# Altium PCB PCB1.PcbDoc
Units mil, origin at the board's own origin, x right, y up, seen from the top; angles counter-clockwise.
Board outline 6000 x 4000 mil, 2 copper layers (Top Layer, Bottom Layer); 4 components, 14 nets, 51 pads, 0 vias.
Unrouted connection lines stored in the file: 8.
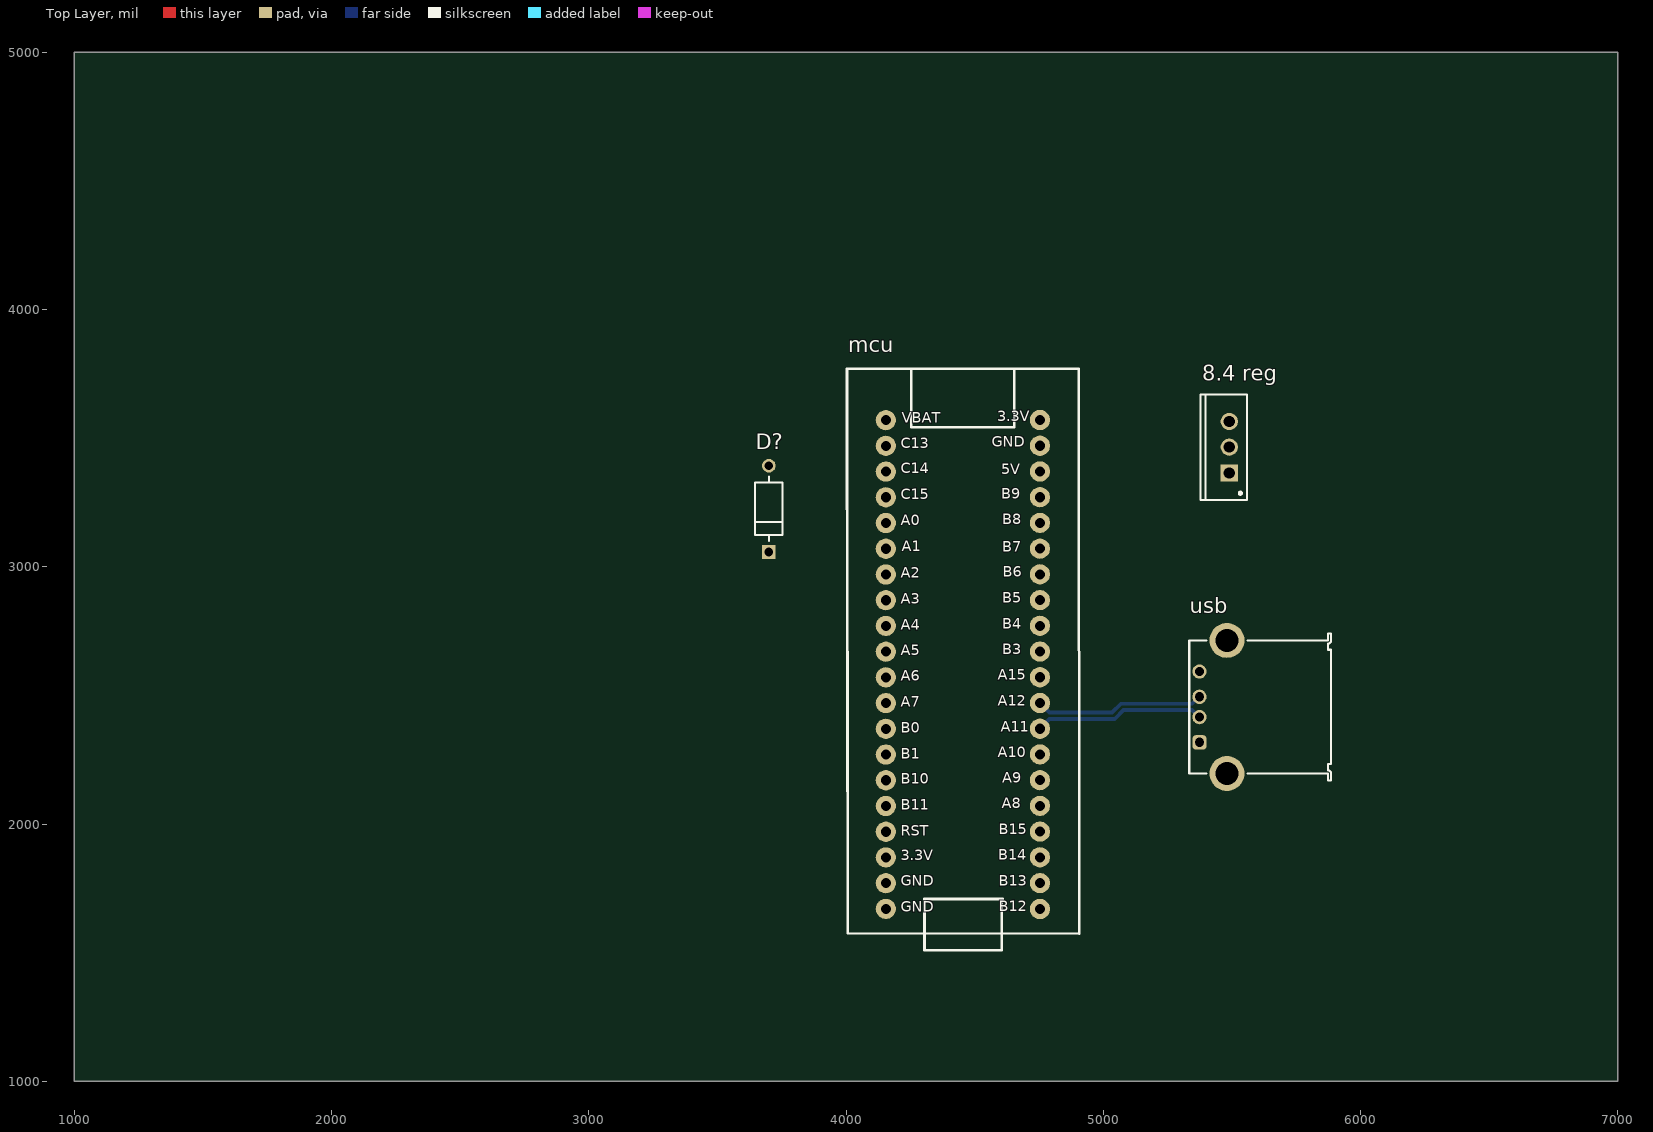
[diagram p0: Top Layer view]
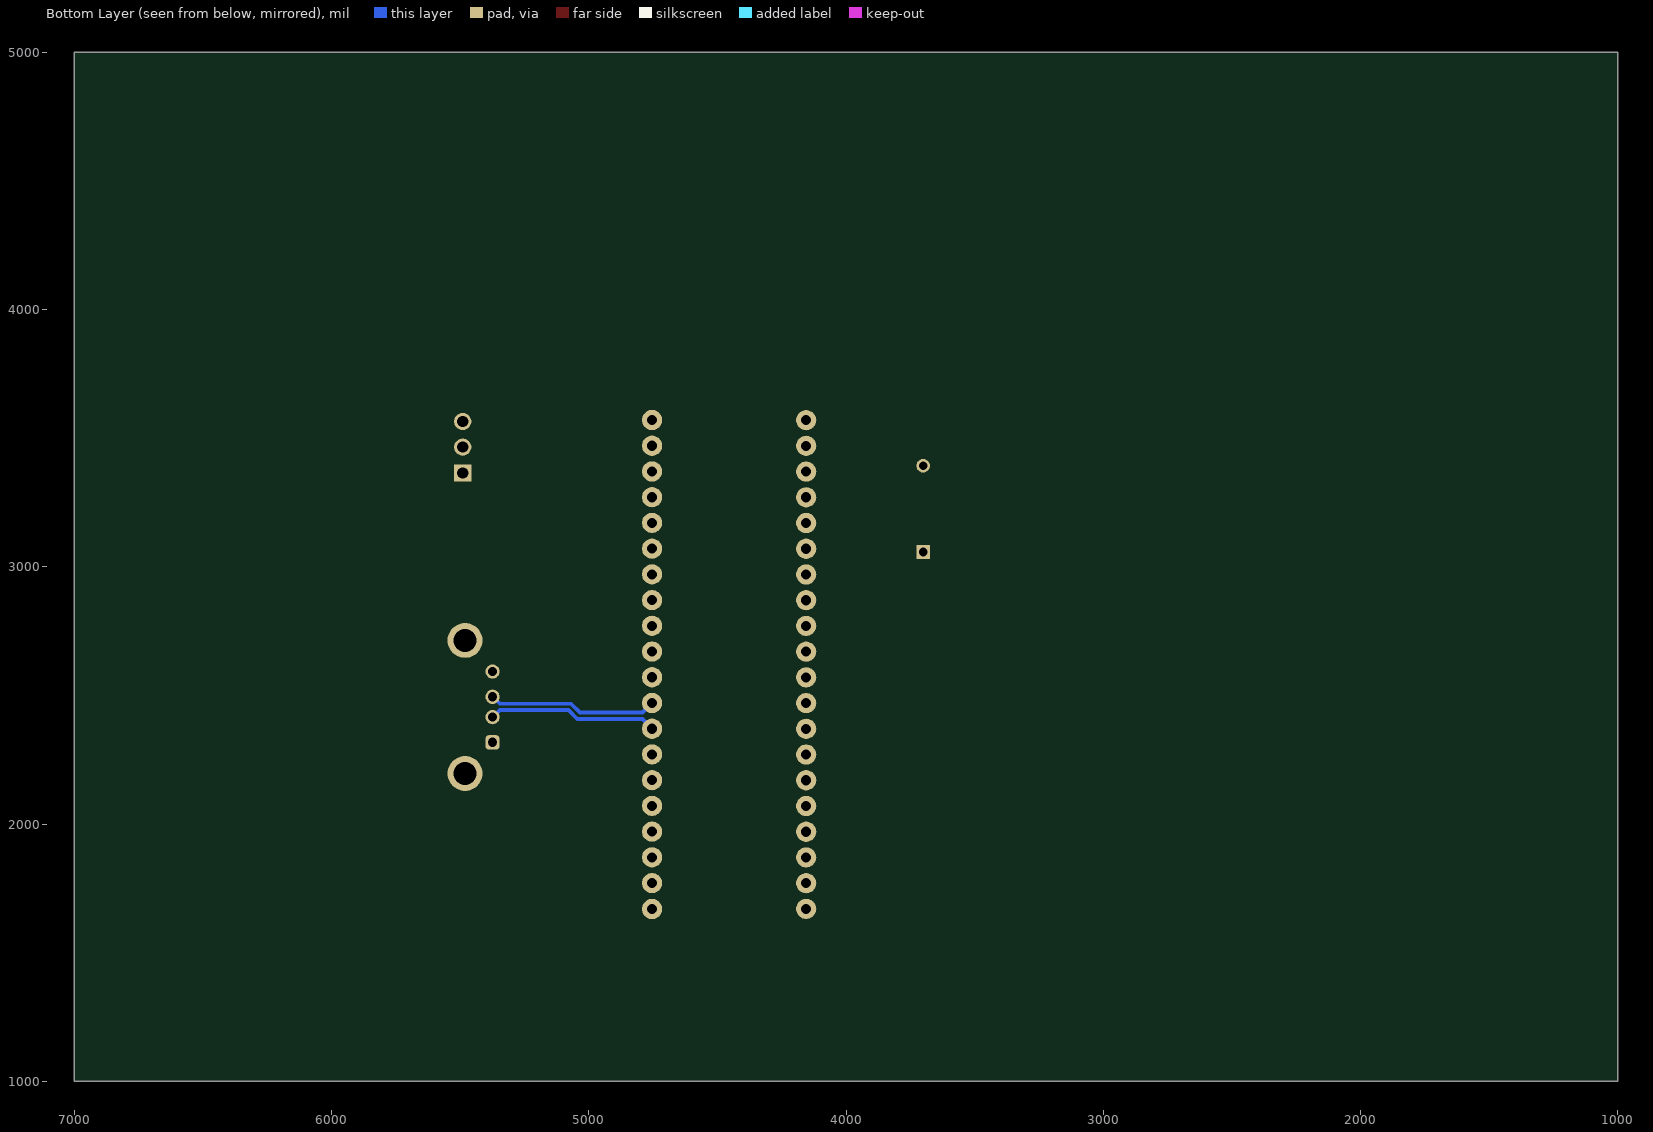
[diagram p1: Bottom Layer view, seen from below]

## Layer stack, top to bottom
Top Solder: solder mask 0.4, Solder Resist, Dk 3.5
Top Layer: signal copper 1.4
Dielectric 1: dielectric 12.6, FR-4, Dk 4.8
Bottom Layer: signal copper 1.4
Bottom Solder: solder mask 0.4, Solder Resist, Dk 3.5

## Board outline
1000,1000 7000,1000 7000,5000 1000,5000

## Design rules (kind name [scope] priority, off if disabled: settings)
Clearance [All] p1: gap=10 ignorepadtopadclearanceinfootprint=FALSE
DiffPairsRouting [All] p1: maxlimit=10 minlimit=10 mostfreqgap=10 toplayer_minwidth=15 toplayer_maxwidth=15 toplayer_prefwidth=15 bottomlayer_minwidth=15 bottomlayer_maxwidth=15 bottomlayer_prefwidth=15 maxuncoupledlength=500
PolygonConnect [All] p1: connectstyle=Relief reliefconductorwidth=10 reliefentries=4 polygonreliefangle="90 Angle" airgapwidth=10
RoutingVias [All] p1: holewidth=28 width=50 viastyle="Through Hole" minholewidth=28 minwidth=50 maxholewidth=28 maxwidth=50
SolderMaskExpansion [All] p1: expansion=4 istentingtop=FALSE
SupplyNets "Schematic Supply Nets_2" [InNet('GND')] p1: voltage=0.000
SupplyNets "Schematic Supply Nets_1" [InNet('+12')] p2: voltage=0.000
SupplyNets "Schematic Supply Nets" [InNet('+5')] p3: voltage=0.000
Width [All] p1: maxlimit=10 minlimit=10 preferedwidth=10
29 further rules are at their usual default settings.

## Classes and differential pairs
differential pair USB: +USB_P -USB_N

## Components (designator, comment, footprint, x,y, rotation, side; value= is the part's Value field where it differs from the comment)
"8.4 reg" "L4940V85" TO220 5490,3465 r90 top
D? "1N4007E-E3/54" FP-1N4007E-E3-54-MFG 3700,3225 r90 top
mcu "STM32F103C8T6" "Stm32 BluePill" 4445.8,2846.93 r0 top
usb "61400416021" 61400416021 5610,2455 r90 top

## Footprints (in the part's own frame and the unit in brackets; to place one, negate y for a bottom-side part, rotate by r counter-clockwise, add the part's x,y. Pads: shape width x height; smd on the part's side, far side on the other; paste and mask are expansions set on the pad)
61400416021 [mm] "USB 2.0 Type A Horizontal"
  rrect50% 1.42x1.42 hole 0.92: 1(-3.5,5.99)
  round 1.42 hole 0.92: 2(-1,5.99) 3(1,5.99) 4(3.5,5.99)
  round 3.45 hole 2.3: Shell(-6.57,3.28) Shell(6.57,3.28)
  silkscreen extent -7.25,-7 7.25,7, body extent -8,-7 8,7, height 7.63
FP-1N4007E-E3-54-MFG [mm]
  rect 1.35x1.35 hole 0.85 paste-2539.97 mask+0: 1(-4.26,0)
  round 1.35 hole 0.85 paste-2539.97 mask+0: 2(4.26,0)
  silkscreen extent -3.18,-1.35 3.18,1.35, body extent -5.03,-1.45 5.03,1.45, height 0.25
"Stm32 BluePill" [mm]
  round 2 hole 1: 1(7.828,-29.909) 2(7.828,-27.343) 3(7.828,-24.803) 4(7.828,-22.263) 5(7.828,-19.723) 6(7.828,-17.183) 7(7.828,-14.643) 8(7.828,-12.103) 9(7.828,-9.563) 10(7.828,-7.023) 11(7.828,-4.483) 12(7.828,-1.943) 13(7.828,0.597) 14(7.828,3.137) 15(7.828,5.677) 16(7.828,8.217) 17(7.828,10.757) 18(7.828,13.297) 19(7.828,15.837) 20(7.828,18.377) 21(-7.386,18.366) 22(-7.386,15.826) 23(-7.386,13.286) 24(-7.386,10.746) 25(-7.386,8.206) 26(-7.386,5.666) 27(-7.386,3.126) 28(-7.386,0.586) 29(-7.386,-1.954) 30(-7.386,-4.494) 31(-7.386,-7.034) 32(-7.386,-9.574) 33(-7.386,-12.114) 34(-7.386,-14.654) 35(-7.386,-17.194) 36(-7.386,-19.734) 37(-7.386,-22.274) 38(-7.386,-24.814) 39(-7.386,-27.354) 40(-7.386,-29.894)
  silkscreen extent -11.22,-34 11.69,23.43, body extent -11.18,-33.27 11.68,24.29, height 12.31
TO220 [mm] "TO, Thru-Hole, Vertical, Heatsink Mounted; 3 In-Line Leads; Pitch 2.54 mm"
  rect 1.7x1.7 hole 1.1: 1(-2.54,0)
  round 1.7 hole 1.1: 2(0,0) 3(2.54,0)
  silkscreen extent -5.2,-1.75 5.2,2.85, body extent -5.25,-1.8 5.25,2.9, height 19.7

## Part data
"8.4 reg": library part CMP-0244-00412-1, "1.5A Very Low Drop Regulator, 3-Pin TO-220", ComponentLink1Description="Manufacturer URL", ComponentLink1URL=http://www.st.com, ComponentLink2Description=Datasheet, ComponentLink2URL=http://www.st.com/internet/com/TECHNICAL_RESOURCES/TECHNICAL_LITERATURE/DATASHEET/CD00000442.pdf, ComponentLink3Description="Package Specification", ComponentLink3URL=http://www.st.com/internet/com/TECHNICAL_RESOURCES/TECHNICAL_LITERATURE/PACKAGE_INFORMATION/CD00004649.pdf, DatasheetVersion=16/12/2009, PackageDescription="TO, Thru-Hole, Vertical, Heatsink Mounted; 3 In-Line Leads; Pitch 2.54 mm", PackageReference=TO220, PackageVersion=ver3.0
D?: library part CMP-02540-000087-1, "DIODE GEN PURP 1KV 1A DO204AL", Average Rectified Current=1A, Case/Package=DO-41, Forward Voltage=1.1V, Max Operating Temperature=150°C, Max Repetitive Reverse Voltage (Vrrm)=1kV, Max Reverse Current=5uA, Max Surge Current=45A, Min Operating Temperature=-50°C, Package Quantity=5500, Contact Plating=Tin, Element Configuration=Single, Max Reverse Voltage (DC)=1kV, Mount="Through Hole", Number of Pins=2, Packaging="Tape and Reel", Peak Non-Repetitive Surge Current=45A, Radiation Hardening=No, Reverse Voltage=1kV, RoHS Compliant=Yes, Series=-
mcu: library part BluePill, "Designed By @Alixahedi"
usb: library part CMP-1502-03227-2, Color=White, Contact Resistance=20mΩ, Current Rating=1.5A, Flammability Rating="UL94 V-0", Insulation Resistance=1GΩ, Max Operating Temperature=105°C, Min Operating Temperature=-40°C, Operating Supply Voltage=30V, Connector Type=USB, Contact Material=Copper, Contact Plating=Gold, Gender=Receptacle, Insulation Material=PBT, Lead Free="Lead Free", Length=15.8mm, Mount="Horizontal, Through Hole", NexarPartId=21041530, Number of Contacts=4, Number of Pins=4, Number of Ports=1, Number of Positions=4, Orientation=Horizontal, REACH SVHC=Unknown, RoHS=Compliant, Termination=Solder, USB Standard="USB 2.0", Voltage Rating=30V, Voltage Rating (DC)=30V, Width=14.4mm

## Nets (pads, with @x,y where several pads share a name; then routed paths per layer and width w, separated by ;. In a path a pad name is that pad's centre, name@x,y a point inside that pad or via, vN(x,y) a via of type N, cw(c..) or ccw(c..) an arc to the next point about the centre after c; other vN are vias at no path point)
3.3: mcu.20 mcu.38
8.4: "8.4 reg.3"
+5: mcu.18
+12: "8.4 reg.1"
GND: "8.4 reg.2" D?.2 mcu.19 mcu.39 mcu.40 usb.4 usb.Shell
NetD?_1: D?.1
Netmcu_36: mcu.36
Netpiston_1: 
Netpower_1: 
Netq?_2: 
pwm: mcu.27
pwm1: mcu.26
USB_N: mcu.8 usb.2 | length 661.2
  Bottom Layer w15: mcu.8 4754.07,2370.43 4791.57,2407.93 5044.66,2407.93 5079.23,2442.5 5344.93,2442.5 5371.8,2415.63 usb.2
USB_P: mcu.9 usb.3 | length 661.2
  Bottom Layer w15: mcu.9 4754.07,2470.43 4791.57,2432.93 5034.3,2432.93 5068.87,2467.5 5344.93,2467.5 5371.8,2494.37 usb.3
pads on no net: mcu.1 mcu.2 mcu.3 mcu.4 mcu.5 mcu.6 mcu.7 mcu.10 mcu.11 mcu.12 mcu.13 mcu.14 mcu.15 mcu.16 mcu.17 mcu.21 mcu.22 mcu.23 mcu.24 mcu.25 mcu.28 mcu.29 mcu.30 mcu.31 mcu.32 mcu.33 mcu.34 mcu.35 mcu.37 usb.1

## Text inside footprints (layer, text, board x,y; h text height)
mcu: Top Overlay "5V" at 4603,3346.68 h70; Top Overlay "B9" at 4603,3251.68 h70; Top Overlay "B8" at 4608,3151.68 h70; Top Overlay "3.3V" at 4588,3551.68 h70; Top Overlay "GND" at 4565.8,3452.68 h70; Top Overlay "A5" at 4213,2641.68 h70; Top Overlay "A2" at 4213,2942.93 h70; Top Overlay "A3" at 4213,2842.68 h70; Top Overlay "A4" at 4213,2740.93 h70; Top Overlay "RST" at 4213,1941.68 h70; Top Overlay "B10" at 4213,2143.68 h70; Top Overlay "B11" at 4213,2041.93 h70; Top Overlay "A6" at 4213,2543.68 h70; Top Overlay "A7" at 4213,2441.93 h70; Top Overlay "B0" at 4213,2341.68 h70; Top Overlay "B1" at 4213,2240.93 h70; Top Overlay "3.3V" at 4213,1844.68 h70; Top Overlay "B15" at 4593.4,1945.68 h70; Top Overlay "A8" at 4605.5,2046.68 h70; Top Overlay "A11" at 4602.2,2344.93 h70; Top Overlay "B3" at 4608,2645.68 h70; Top Overlay "A9" at 4606.7,2147.68 h70; Top Overlay "A15" at 4590.9,2547.68 h70; Top Overlay "A12" at 4590.9,2445.93 h70; Top Overlay "A10" at 4590.9,2245.68 h70; Top Overlay "VBAT" at 4215.87,3546.93 h70; Top Overlay "B5" at 4608,2846.68 h70; Top Overlay "B14" at 4592.2,1847.93 h70; Top Overlay "B7" at 4608,3044.93 h70; Top Overlay "B4" at 4606.7,2744.93 h70; Top Overlay "B6" at 4609.2,2947.68 h70; Top Overlay "C15" at 4213,3248.68 h70; Top Overlay "C13" at 4213,3447.68 h70; Top Overlay "C14" at 4213,3349.68 h70; Top Overlay "A0" at 4213,3147.68 h70; Top Overlay "A1" at 4215.8,3046.93 h70; Top Overlay "GND" at 4213,1746.68 h70; Top Overlay "B13" at 4593,1746.68 h70; Top Overlay "GND" at 4213,1645.68 h70; Top Overlay "B12" at 4593.4,1647.93 h70
usb: Top 3D Body "PCB Edge" at 5933.62,2368.39 h32 r90